# Altium PCB e-stop.PcbDoc
Units mil, origin at the board's own origin, x right, y up, seen from the top; angles counter-clockwise.
Board outline 2100 x 2250 mil, 2 copper layers (Top Layer, Bottom Layer); 10 components, 11 nets, 46 pads, 0 vias.
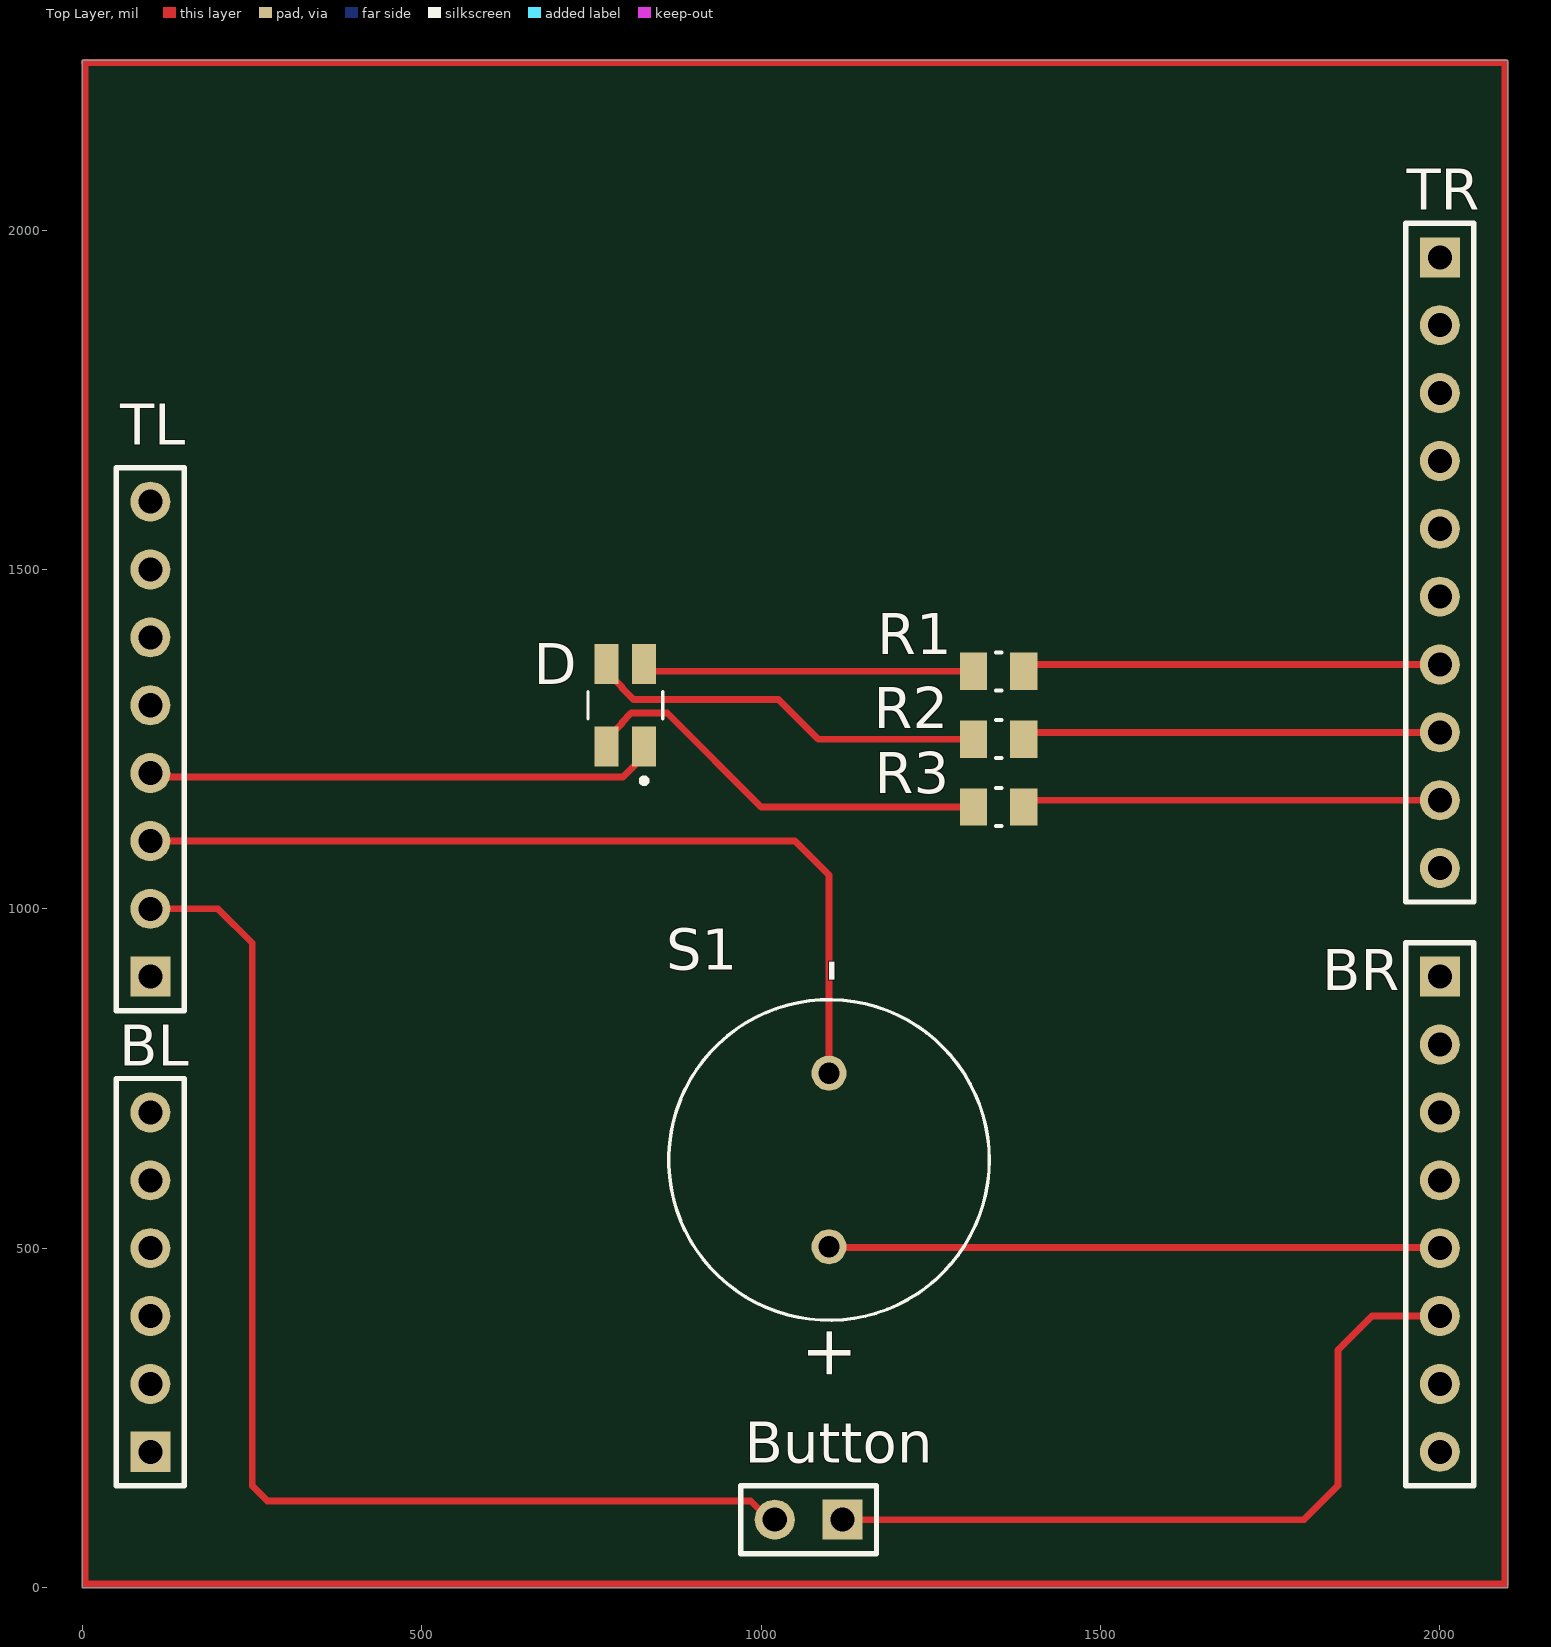
[diagram p0: Top Layer view]
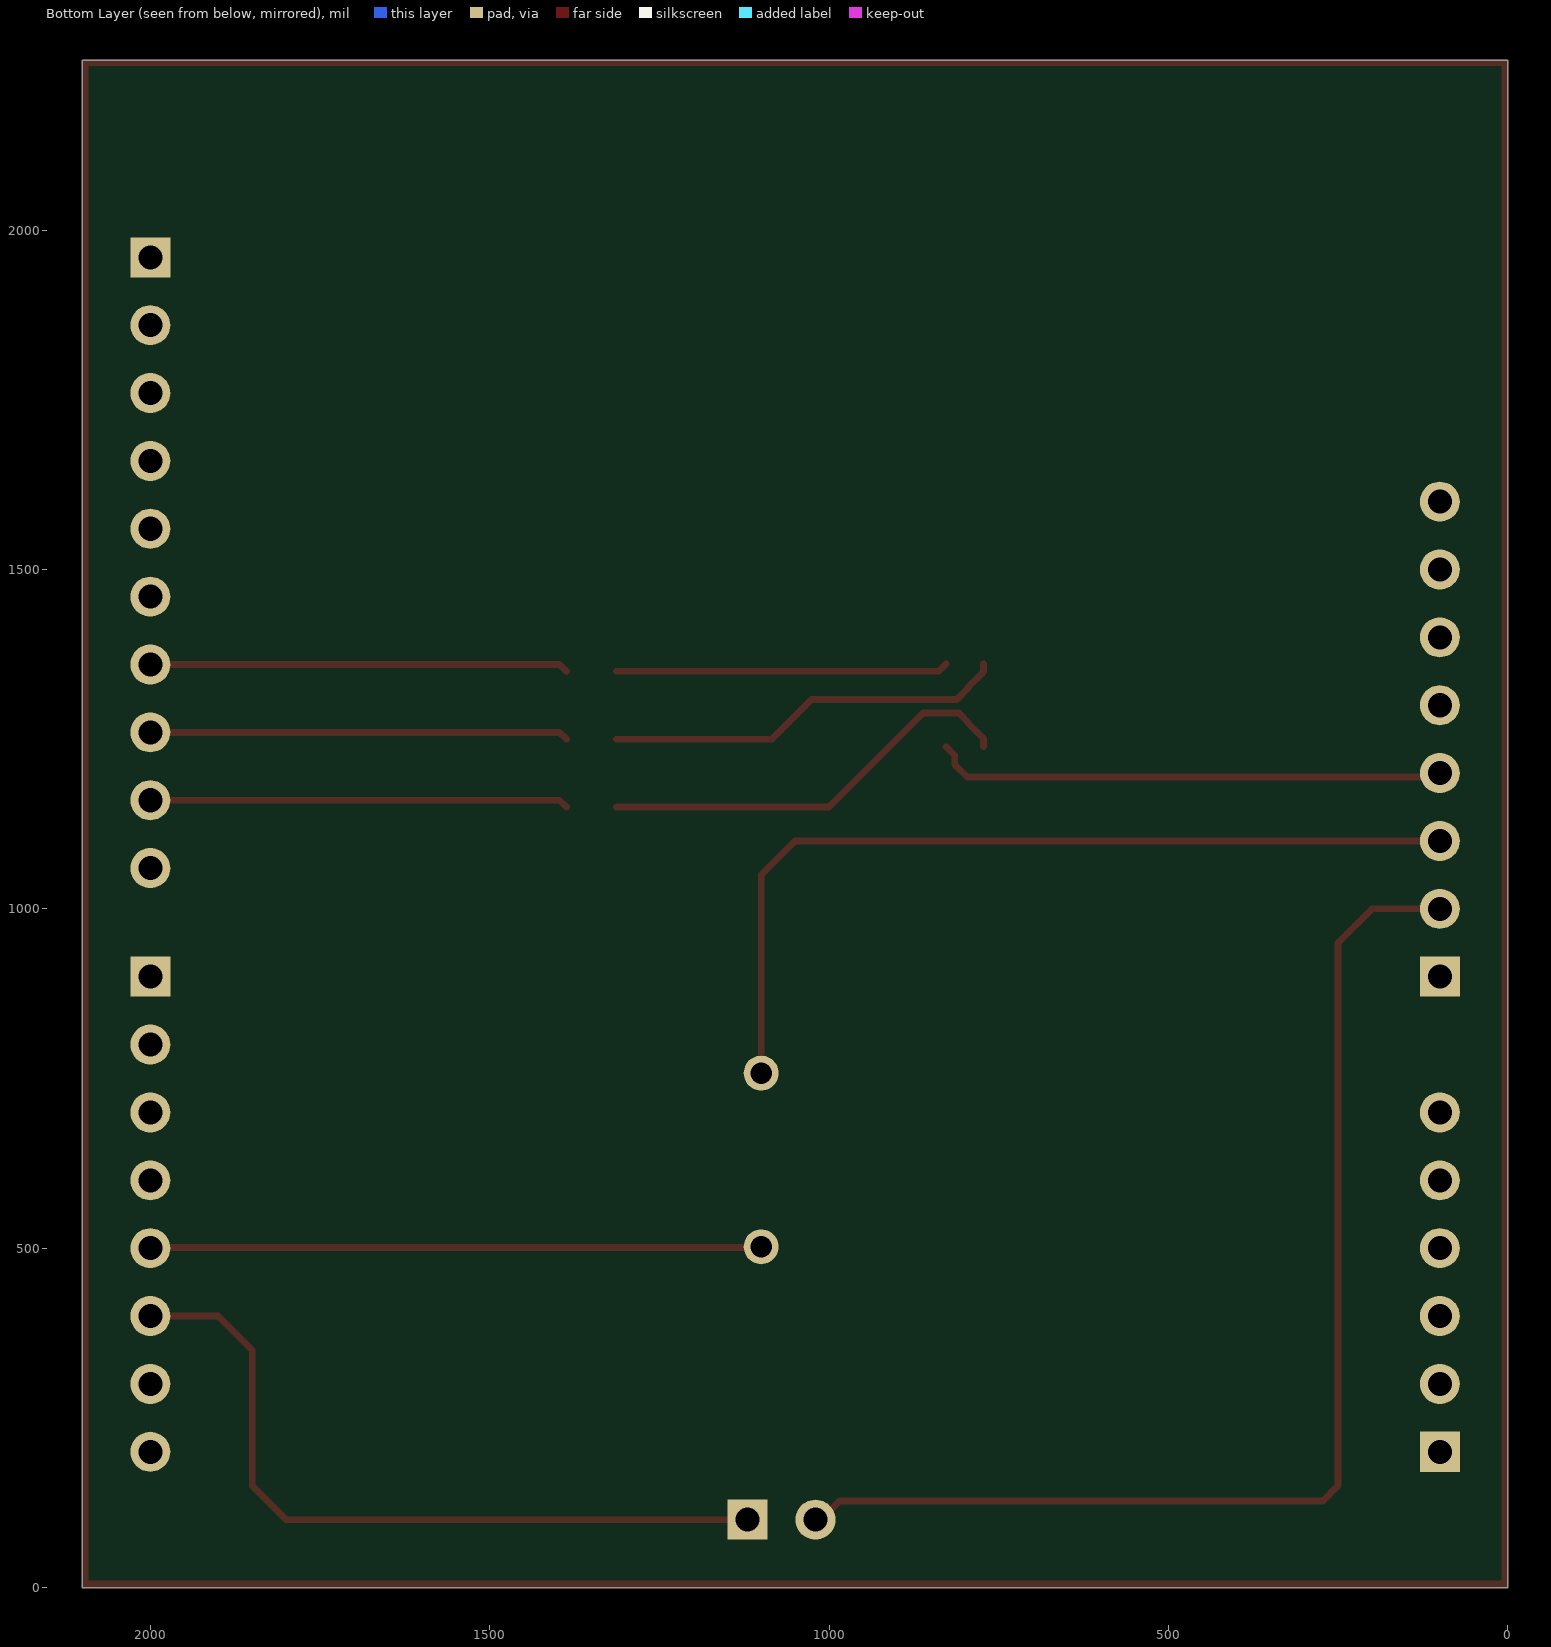
[diagram p1: Bottom Layer view, seen from below]

## Layer stack, top to bottom
Top Solder: solder mask 0.4, Solder Resist, Dk 3.5
Top Layer: signal copper 1.4
Dielectric 1: dielectric 12.6, FR-4, Dk 4.8
Bottom Layer: signal copper 1.4
Bottom Solder: solder mask 0.4, Solder Resist, Dk 3.5

## Board outline
0,2250 0,0 2100,0 2100,2250

## Design rules (kind name [scope] priority, off if disabled: settings)
Clearance [All] p1: gap=10 ignorepadtopadclearanceinfootprint=FALSE except(0: Arc-Hole Track-Hole SMDPad-Hole THPad-Hole Via-Hole Fill-Hole Poly-Hole Region-Hole Text-Hole)
PolygonConnect [All] p1: connectstyle=Relief reliefconductorwidth=10 reliefentries=4 polygonreliefangle="90 Angle" airgapwidth=10
RoomDefinition e-stop [InComponentClass('e-stop')] p1: confinementstyle=ConfineIn formatcopy=TRUE lockcomponents=FALSE outline 0,0 2100,0 2100,2250 0,2250
RoutingVias [All] p1: holewidth=28 width=50 viastyle="Through Hole" minholewidth=28 minwidth=50 maxholewidth=28 maxwidth=50
SolderMaskExpansion [All] p1: expansion=4 istentingtop=FALSE
Width [All] p1: maxlimit=10 minlimit=10 preferedwidth=10
30 further rules are at their usual default settings.

## Components (designator, comment, footprint, x,y, rotation, side; value= is the part's Value field where it differs from the comment)
BL "Header 6" HDR1X6 100,200 r90 top
BR "Header 8" HDR1X8 2000,900 r270 top
Button "Header 2" HDR1X2 1120,100 r180 top
D "150141M173100" LED_150141M173100 800,1300 r270 top
R1 "150" 0805 1350,1350 r180 top
R2 "100" 0805 1350,1250 r180 top
R3 "100" 0805 1350,1150 r180 top
S1 "BUZZER CEM-1203" CEM-1203 1100,630 r90 top
TL "Header 8" HDR1X8 100,900 r90 top
TR "Header 10" HDR1X10 2000,1960 r270 top

## Footprints (in the part's own frame and the unit in brackets; to place one, negate y for a bottom-side part, rotate by r counter-clockwise, add the part's x,y. Pads: shape width x height; smd on the part's side, far side on the other; paste and mask are expansions set on the pad)
0805 [mil]
  rect 40x55 smd: 1(-37,0) 2(37,0)
  silkscreen extent -4,-28 4,28
CEM-1203 [mm] "2048 Hz Speaker"
  round 1.308 hole 0.8: N(3.25,0) P(-3.25,0)
  silkscreen extent -6,-6 6,6, body extent -6.25,-6.25 6.25,6.25, height 9.1
HDR1X2 [mm] "Connector; Header; 2 Position"
  rect 1.5x1.5 hole 0.9: 1(0,0)
  round 1.5 hole 0.9: 2(2.54,0)
  silkscreen extent -1.27,-1.27 3.81,1.27
HDR1X6 [mm] "Connector; Header; 6 Position"
  rect 1.5x1.5 hole 0.9: 1(0,0)
  round 1.5 hole 0.9: 2(2.54,0) 3(5.08,0) 4(7.62,0) 5(10.16,0) 6(12.7,0)
  silkscreen extent -1.27,-1.27 13.97,1.27
HDR1X8 [mm] "Connector; Header; 8 Position"
  rect 1.5x1.5 hole 0.9: 1(0,0)
  round 1.5 hole 0.9: 2(2.54,0) 3(5.08,0) 4(7.62,0) 5(10.16,0) 6(12.7,0) 7(15.24,0) 8(17.78,0)
  silkscreen extent -1.27,-1.27 19.05,1.27
HDR1X10 [mm] "Connector; Header; 10 Position"
  rect 1.5x1.5 hole 0.9: 1(0,0)
  round 1.5 hole 0.9: 2(2.54,0) 3(5.08,0) 4(7.62,0) 5(10.16,0) 6(12.7,0) 7(15.24,0) 8(17.78,0) 9(20.32,0) 10(22.86,0)
  silkscreen extent -1.27,-1.27 24.13,1.27
LED_150141M173100 [mm]
  rect 1.5x0.9 smd: 1(1.55,0.7) 2(1.55,-0.7) 3(-1.55,0.7) 4(-1.55,-0.7)
  silkscreen extent -0.5,-1.4 2.92,1.4

## Part data
BL: "Header, 6-Pin", LatestRevisionDate=17-Jul-2002, LatestRevisionNote="Re-released for DXP Platform.", Publisher="Altium Limited"
BR TL: "Header, 8-Pin", LatestRevisionDate=17-Jul-2002, LatestRevisionNote="Re-released for DXP Platform.", Publisher="Altium Limited"
Button: "Header, 2-Pin", LatestRevisionDate=17-Jul-2002, LatestRevisionNote="Re-released for DXP Platform.", Publisher="Altium Limited"
D: "Red, Green, Blue _RGB_ 625nm Red, 520nm Green, 470nm Blue LED Indication - Discrete 2V Red, 3.2V Green, 3.2V Blue 1411 _3528 Metric_", Package="1411 WÃ¼rth Elektronik", Availability=Unavailable, MF="Wurth Electronics", MP=150141M173100, Price=None, SnapEDA_Link=https://www.snapeda.com/parts/150141M173100/Wurth%20Electronics%20Inc./view-part/281733/?ref=snap
R1: library part "RES 150.0 1/8W", "RES SMD 150 OHM 5% 1/8W 0805", Package=0805, Power (Watts)=0.125W, Tolerance=5%
R2 R3: library part "RES 100.0 1/8W", "RES SMD 100 OHM 5% 1/8W 0805", Package=0805, Power (Watts)=0.125W, Tolerance=5%
S1: "AUDIO MAGNETIC XDCR 3-5V TH", Current Rating="35 mA @ 3.5 V", Frequency="2.048 kHz @ 3.5 V", Part Name=CEM-1203, Rated Voltage="3-5 V", Supplier Part Number 1=102-1153-ND, ComponentLink1Description="Digikey Link", ComponentLink1URL=https://www.digikey.ca/products/en?keywords=CEM%201203%20buzzer, ComponentLink2Description="SnapEDA Link", ComponentLink2URL=https://www.snapeda.com/parts/CEM-1203%2842%29/CUI%20Devices/view-part/?ref=search&t=CEM%201203, Decibels="85 dB @ 3.5 V", Supplier 1=Digi-Key
TR: "Header, 10-Pin", LatestRevisionDate=17-Jul-2002, LatestRevisionNote="Re-released for DXP Platform.", Publisher="Altium Limited"

## Nets (pads, with @x,y where several pads share a name; then routed paths per layer and width w, separated by ;. In a path a pad name is that pad's centre, name@x,y a point inside that pad or via, vN(x,y) a via of type N, cw(c..) or ccw(c..) an arc to the next point about the centre after c; other vN are vias at no path point)
NetBR_6: BR.6 Button.1 | length 1121.4
  Top Layer w10: Button.1 1800,100 1850,150 1850,350 1900,400 BR.6
NetButton_2: Button.2 TL.2 | length 1761.4
  Top Layer w10: TL.2 200,1000 250,950 250,150 272.38,127.62 984.65,127.62 1012.27,100 Button.2
NetD_1: D.1 TL.4 | length 756.1
  Top Layer w10: TL.4 105.55,1194.45 796.37,1194.45 814.84,1212.92 814.84,1226.26 D.1
NetD_2: D.2 R3.2 | length 626.2
  Top Layer w10: D.2 772.44,1250.79 794.84,1273.19 794.84,1274.72 808.51,1288.39 861.61,1288.39 1000,1150 R3.2
NetD_3: D.3 R1.2 | length 490
  Top Layer w10: D.3 838.58,1350 R1.2
NetD_4: D.4 R2.2 | length 594.4
  Top Layer w10: D.4 772.44,1349.21 794.84,1326.81 794.84,1325.28 811.74,1308.39 1025.68,1308.39 1084.06,1250 R2.2
NetS1_N: S1.N TL.3 | length 1312.8
  Top Layer w10: TL.3 1050,1100 1100,1050 S1.N
PWM: BR.5 S1.P | length 900.8
  Top Layer w10: S1.P 1101.02,501.02 1998.98,501.02 BR.5
"PWM D9": R3.1 TR.9 | length 617.1
  Top Layer w10: R3.1 1397,1160 TR.9
"PWM D10": R2.1 TR.8 | length 617.1
  Top Layer w10: R2.1 1397,1260 TR.8
"PWM D11": R1.1 TR.7 | length 617.1
  Top Layer w10: R1.1 1397,1360 TR.7
pads on no net: BL.1 BL.2 BL.3 BL.4 BL.5 BL.6 BR.1 BR.2 BR.3 BR.4 BR.7 BR.8 TL.1 TL.5 TL.6 TL.7 TL.8 TR.1 TR.2 TR.3 TR.4 TR.5 TR.6 TR.10
copper on no net: | length 8668
  Top Layer w10: 3,2247 2096,2247 2096,5 4,5 4,2246

## Dimensions
2000,200 to 2100,260 on Top Layer
100,200 to 0,-10 on Top Layer

## Text inside footprints (layer, text, board x,y; h text height)
S1: Top Overlay "+" at 1132,303 h73.82 r90; Top Overlay "-" at 1132.32,890.14 h73.82 r90